# Allegro board OpenCellular_Connect-1_GBC_Life-3_Board_v1.1.brd
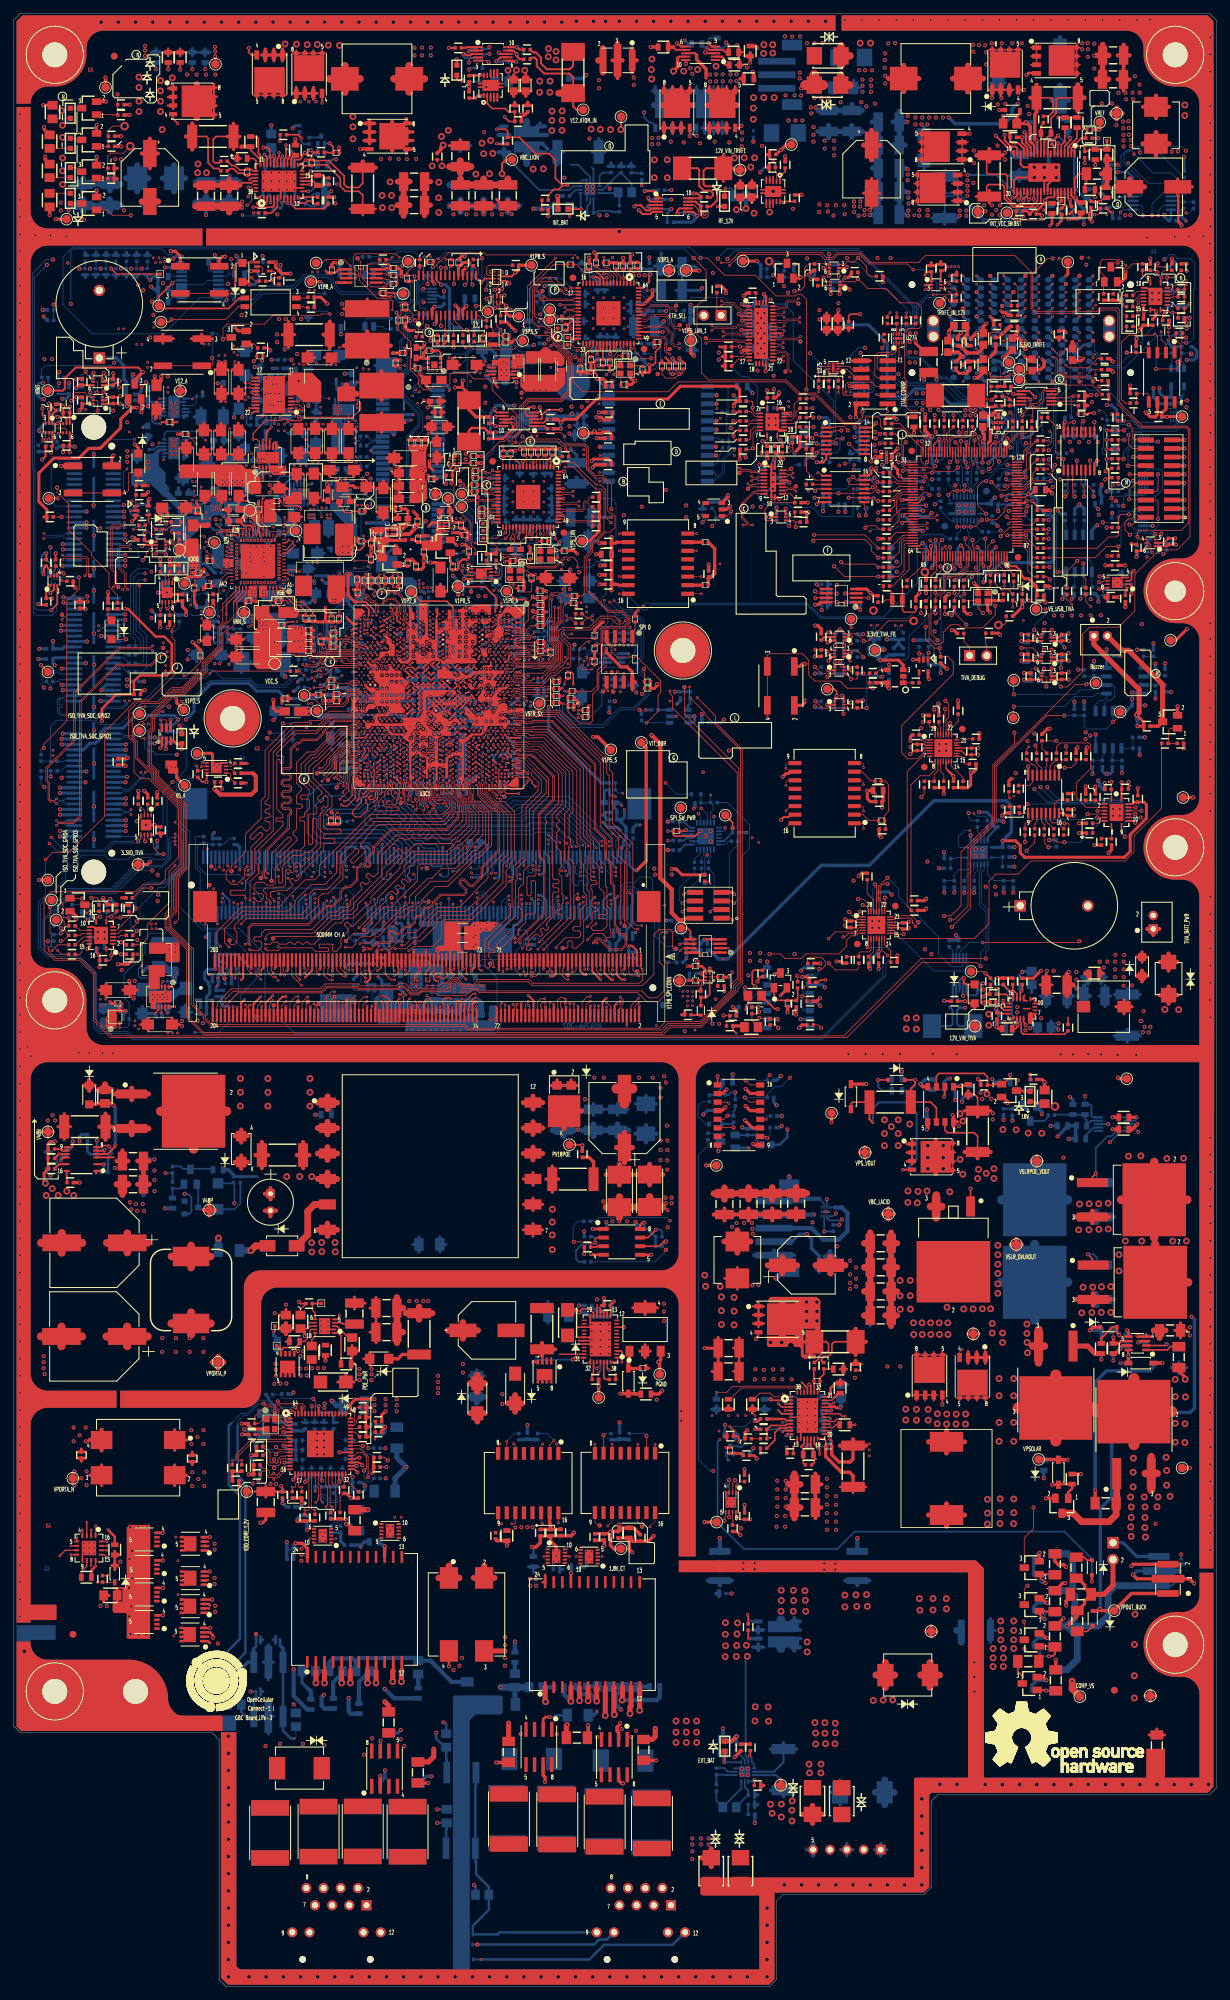
[diagram p0: board, top side]
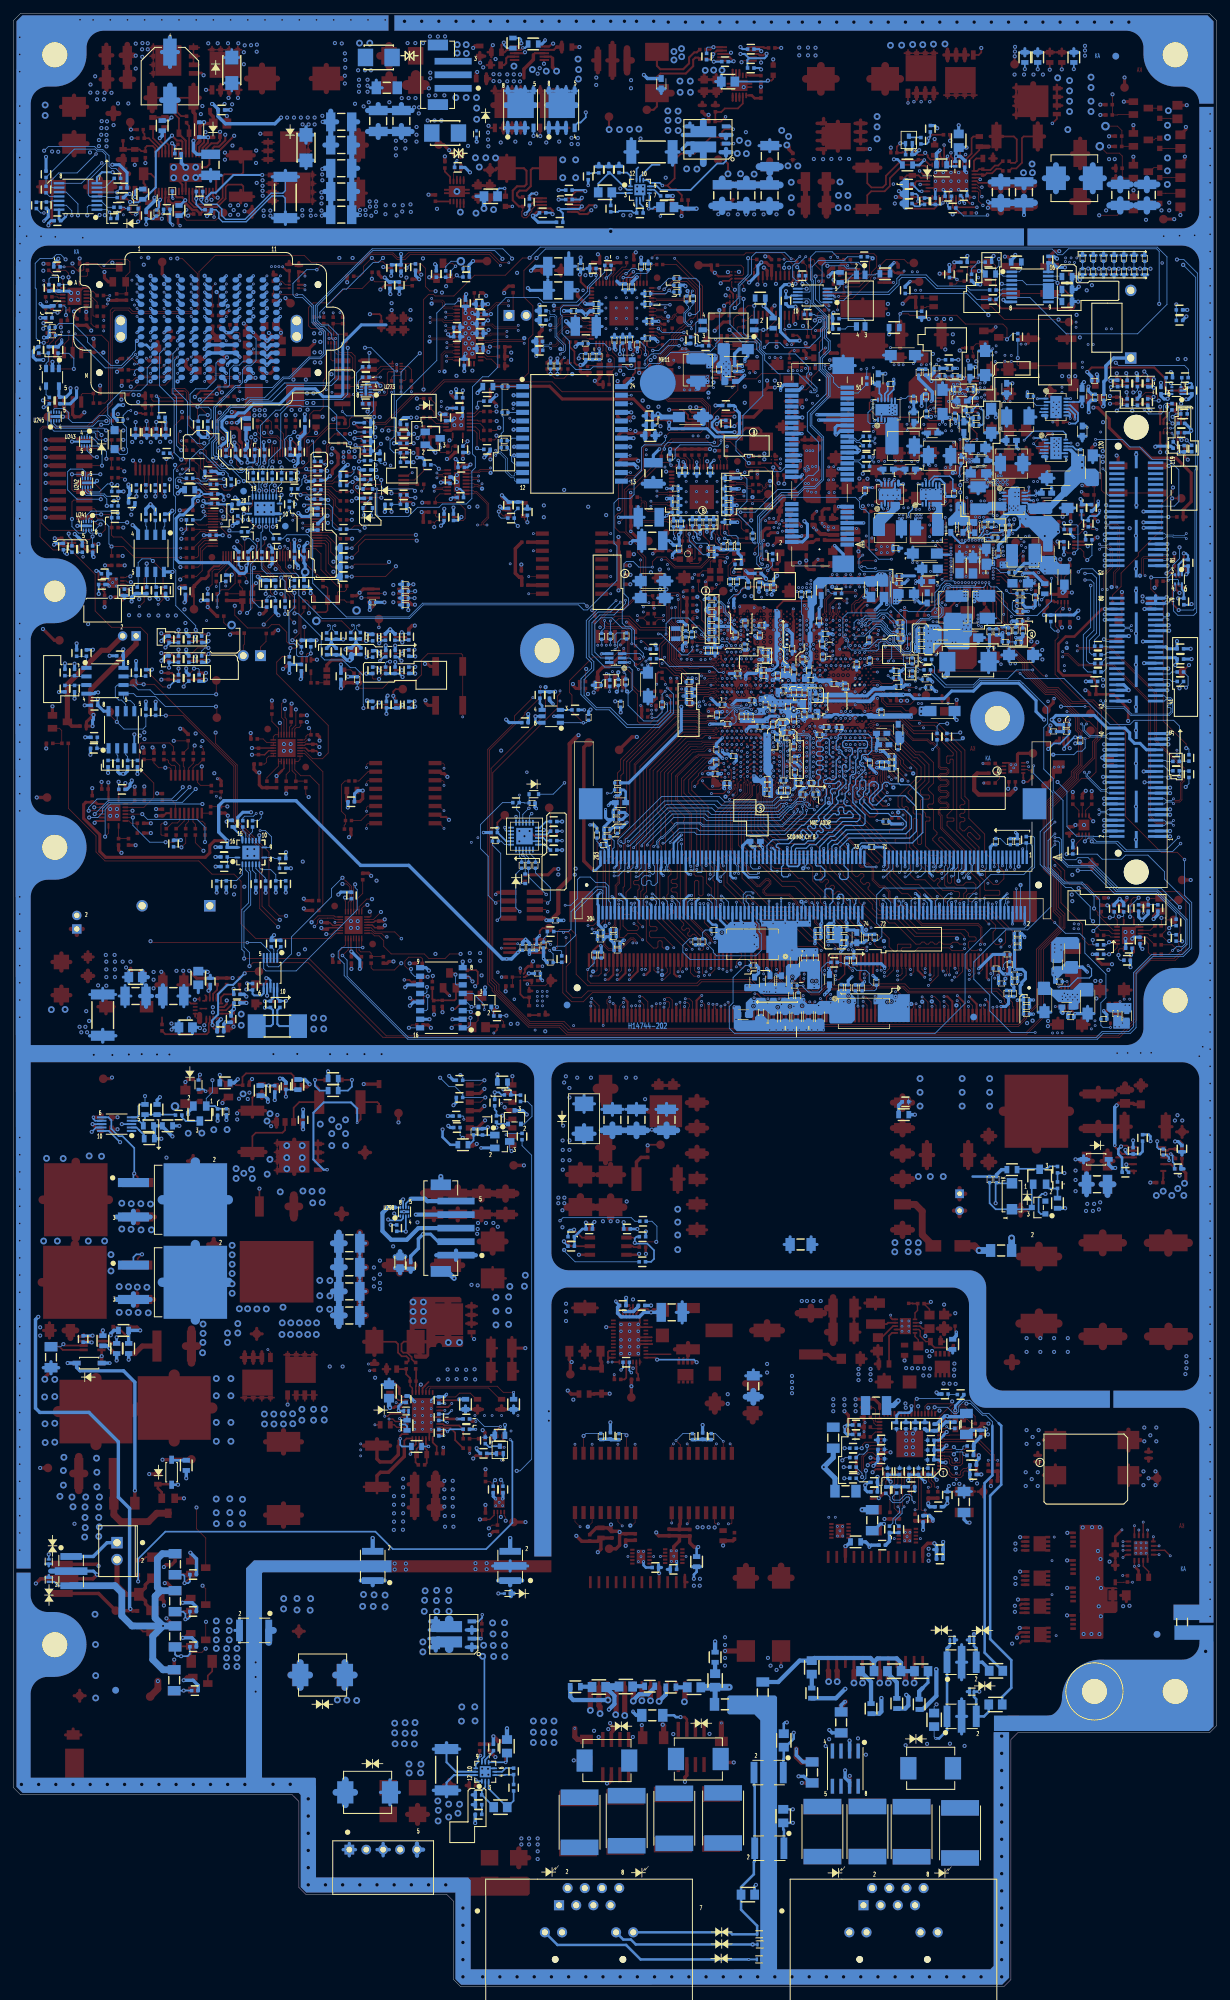
[diagram p1: board, bottom side, seen from below]

Outline 177.8 x 291.49 mm; copper layers: TOP, L2_GND, L3_SIG, L4_PWR1, L5_SIG, L6_SIG, L7_PWR2, L8_SIG, L9_GND, BOTTOM. Coordinates in mm from the lower left corner of the outline.
Outline path: 0,290.48 0,38.51 1.02,37.49 29.36,37.49 30.38,36.48 30.38,1.02 31.4,0 111.74,0 112.76,1.02 112.76,12.6 113.78,13.62 134.6,13.62 135.62,14.63 135.62,27.33 136.64,28.35 176.78,28.35 177.8,29.36 177.8,290.48 176.78,291.49 1.02,291.49 0,290.48

## Design rules (mm)
constraint set DEFAULT: min track width 0.119
net group BAT_D: nets BAT_D N45259
net group DDR3_DRAM_PWROK: nets DDR3_DRAM_PWROK UNNAMED_127_IDTP9145R1P15_I1_DR
net group DDR3_VREF: nets DDR3_VREF UNNAMED_3_RESN_I168_A
net group DP_DDR3_MON1: nets DDR3_MON1N DDR3_MON1P
net group DP_DDR3_MON2: nets DDR3_MON2N DDR3_MON2P
net group DP_DDR3_REF: nets DDR3_REFN DDR3_REFP
net group DP_DEBUG_USB3_RX0: nets DEBUG_USB3_RX0_N DEBUG_USB3_RX0_P
net group DP_DEBUG_USB3_TX0: nets DEBUG_USB3_TX0_N DEBUG_USB3_TX0_P
net group DP_GBE_MDI0P_DEBUG_01: nets GBE_MDI0N_DEBUG GBE_MDI0P_DEBUG
net group DP_GBE_MDI1P_DEBUG_01: nets GBE_MDI1N_DEBUG GBE_MDI1P_DEBUG
net group DP_GBE_MDI2_SW: nets GBE_MDI2N_SW GBE_MDI2P_SW
net group DP_GBE_MDI2P_DEBUG: nets GBE_MDI2N_DEBUG GBE_MDI2P_DEBUG
net group DP_GBE_MDI3P_DEBUG: nets GBE_MDI3N_DEBUG GBE_MDI3P_DEBUG
net group DP_HDMI_CLK_C_D: nets HDMI_CLK_DN HDMI_CLK_DP
net group DP_HDMI_DATA0_D: nets HDMI_DATA0_DN HDMI_DATA0_DP
net group DP_HDMI_DATA1_D: nets HDMI_DATA1_DN HDMI_DATA1_DP
net group DP_HDMI_DATA2_D: nets HDMI_DATA2_DN HDMI_DATA2_DP
net group DP_LAN1_MDI0: nets LAN1_MDI0N LAN1_MDI0P
net group DP_LAN1_MDI1: nets LAN1_MDI1N LAN1_MDI1P
net group DP_LAN1_MDI2: nets LAN1_MDI2N LAN1_MDI2P
net group DP_LAN1_MDI3: nets LAN1_MDI3N LAN1_MDI3P
net group DP_LAN2_MDI0: nets GBE_MDI0N GBE_MDI0P
net group DP_LAN2_MDI1: nets GBE_MDI1N GBE_MDI1P
net group DP_LAN2_MDI2: nets GBE_MDI2N GBE_MDI2P
net group DP_LAN2_MDI3: nets GBE_MDI3N GBE_MDI3P
net group DP_LAN_MDI0: nets LAN_MDI0N LAN_MDI0P
net group DP_LAN_MDI1: nets LAN_MDI1N LAN_MDI1P
net group DP_LAN_MDI2: nets LAN_MDI2N LAN_MDI2P
net group DP_LAN_MDI3: nets LAN_MDI3N LAN_MDI3P
net group DP_M_A_CK_DDR0: nets M_A_CK_DDR0_N M_A_CK_DDR0_P
net group DP_M_A_CK_DDR2: nets M_A_CK_DDR2_N M_A_CK_DDR2_P
net group DP_MDI0: nets MDI0N MDI0P
net group DP_MDI1: nets MDI1N MDI1P
net group DP_PCIE0_GBE_CLK: nets PCIE0_GBE_CLKN PCIE0_GBE_CLKP
net group DP_PCIE0_RX: nets PCIE0_RXN PCIE0_RXP
net group DP_PCIE0_TX: nets PCIE0_TXN PCIE0_TXP
net group DP_PCIE_GBE2_100M_D: nets PCIE_GBE2_100M_DN PCIE_GBE2_100M_DP
net group DP_PCIE_GBE_100M_D: nets PCIE_GBE_100M_DN PCIE_GBE_100M_DP
net group DP_SATA_RX0: nets SATA_RXN0 SATA_RXP0
net group DP_SATA_RX1: nets SATA_RXN1 SATA_RXP1
net group DP_SATA_TX0: nets SATA_TXN0 SATA_TXP0
net group DP_TRXFE_USB3_RX0: nets TRXFE_USB3_RX0_N TRXFE_USB3_RX0_P
net group DP_TRXFE_USB3_TX0: nets TRXFE_USB3_TX0_N TRXFE_USB3_TX0_P
net group DP_USB0: nets USB_DN0 USB_DP0
net group DP_USB1: nets USB_DN1 USB_DP1
net group DP_USB2: nets USB_DN2 USB_DP2
net group DP_USB3: nets USB_DN3 USB_DP3
net group DP_USB3_P0_ICLK: nets USB3_P0_ICLK_DN USB3_P0_ICLK_DP
net group DP_USB3_P1_ICLK: nets USB3_P1_ICLK_DN USB3_P1_ICLK_DP
net group DP_USB3_RX0: nets USB3_RX0_N USB3_RX0_P
net group DP_USB3_TX0: nets USB3_TX0_N USB3_TX0_P
net group DP_USB3_TX0_01: nets N20572057 N20572071
net group DP_USB_REFCLK: nets USB_REFCLKN USB_REFCLKP
net group ETHSW_P1CONN_RX: nets ETHSW_P1CONN_RXN ETHSW_P1CONN_RXP
net group ETHSW_TIVA_P0_TX: nets ETHSW_TIVA_P0_TXN ETHSW_TIVA_P0_TXP
net group GBE_MDI0_SW: nets GBE_MDI0N_SW GBE_MDI0P_SW
net group GBE_MDI1_SW: nets GBE_MDI1N_SW GBE_MDI1P_SW
net group GBE_MDI3_SW: nets GBE_MDI3N_SW GBE_MDI3P_SW
net group LAN1_PET_DN: nets LAN1_PET_DN PCIE2_RXN_LAN
net group LAN1_PET_DP: nets LAN1_PET_DP PCIE2_RXP_LAN
net group LAN1_XTALIN: nets LAN1_XTALIN LAN1_XTALOUT
net group LAN_PCIE_CLKREQ1B: nets LAN_PCIE_CLKREQ1B N21429834
net group LAN_PET_DN: nets LAN_PET_DN PCIE1_RXN_LAN
net group LAN_PET_DP: nets LAN_PET_DP PCIE1_RXP_LAN
net group LAN_XTALIN: nets LAN_XTALIN LAN_XTALOUT
net group MSATA_PWR_EN: nets MSATA_PWR_EN N25801615
net group N264407: nets N264407 N264411
net group N265551: nets N265551 N266029
net group N272981: nets N272981 N272985
net group N274115: nets N274115 N274567
net group N17632894: nets N17632894 N26216543
net group N26216535: nets N39211 N26216535
net group PCIE1_TXN_LAN: nets PCIE1_TXN_LAN UNNAMED_6_BYTISOCR1P1_I118_PC_2
net group PCIE1_TXP_LAN: nets PCIE1_TXP_LAN UNNAMED_6_BYTISOCR1P1_I118_PC_4
net group PCIE2_TXN_LAN: nets PCIE2_TXN_LAN UNNAMED_6_BYTISOCR1P1_I118_PC_1
net group PCIE2_TXP_LAN: nets PCIE2_TXP_LAN UNNAMED_6_BYTISOCR1P1_I118_PC_3
net group PRGMR_SPI_CLK: nets P_SPI_CLK PRGMR_SPI_CLK
net group PRGMR_SPI_CS0_N: nets P_SPI_CS0_N PRGMR_SPI_CS0_N
net group PRGMR_SPI_MISO: nets P_SPI_MISO PRGMR_SPI_MISO
net group PRGMR_SPI_MOSI: nets P_SPI_MOSI PRGMR_SPI_MOSI
net group SOC_FLASH_WP_N: nets SOC_FLASH_WP_N V1P8_SPI_CONN
net group SOC_I2C_SCL: nets SOC_I2C_SCL UNNAMED_7_BYTISOCR1P1_I121_SIOI
net group SOC_I2C_SDA: nets SOC_I2C_SDA UNNAMED_7_BYTISOCR1P1_I121_SI_1
net group SOC_SPI_CLK: nets SOC_SPI_CLK SPI0_CLK
net group SOC_SPI_CS0_N: nets SOC_SPI_CS0_N SPI0_CS0_N
net group SOC_SPI_MISO: nets SOC_SPI_MISO SPI0_MISO
net group SOC_SPI_MOSI: nets SOC_SPI_MOSI SPI0_MOSI
net group SOC_SVID_ALERT_B: nets SOC_SVID_ALERT_B UNNAMED_25_BYTISOCR1P1_I90_SVID
net group SOC_SVID_CLK: nets SOC_SVID_CLK UNNAMED_25_BYTISOCR1P1_I90_SV_1
net group SOC_SVID_DATA: nets SOC_SVID_DATA UNNAMED_25_BYTISOCR1P1_I90_SV_2
net group SUS_STAT_B: nets SUS_STAT_B SUS_STAT_B_R
net group T_ETHSW_TIVA_P0_TX: nets T_ETHSW_TIVA_P0_TXN T_ETHSW_TIVA_P0_TXP
net group T_MDI0: nets T_MDI0N T_MDI0P
net group T_MDI1: nets T_MDI1N T_MDI1P
net group T_RX: nets T_RXN T_RXP
net group T_TIVA_ETHSW_P0_RX: nets T_TIVA_ETHSW_P0_RXN T_TIVA_ETHSW_P0_RXP
net group T_TX: nets T_TXN T_TXP
net group TIVA_ETHSW_P0_RX: nets TIVA_ETHSW_P0_RXN TIVA_ETHSW_P0_RXP
net group TPM_ILB_SERIRQ: nets TPM_ILB_SERIRQ UNNAMED_81_RESN_I34_B
net group UNNAMED_5_BYTISOCR1P1_I176_DDIR: nets UNNAMED_5_BYTISOCR1P1_I176_DD_1 UNNAMED_5_BYTISOCR1P1_I176_DDIR
net group UNNAMED_5_BYTISOCR1P1_I176_RESE: nets UNNAMED_5_BYTISOCR1P1_I176_RE_1 UNNAMED_5_BYTISOCR1P1_I176_RESE
net group UNNAMED_6_BYTISOCR1P1_I118_PCIE: nets UNNAMED_6_BYTISOCR1P1_I118_PC_5 UNNAMED_6_BYTISOCR1P1_I118_PCIE
net group UNNAMED_6_BYTISOCR1P1_I118_SATA: nets UNNAMED_6_BYTISOCR1P1_I118_SA_1 UNNAMED_6_BYTISOCR1P1_I118_SATA
net group UNNAMED_25_BYTISOCR1P1_I90_ICLK: nets UNNAMED_25_BYTISOCR1P1_I90_IC_1 UNNAMED_25_BYTISOCR1P1_I90_ICLK
net group UNNAMED_25_BYTISOCR1P1_I90_IL_1: nets UNNAMED_25_BYTISOCR1P1_I90_IL_1 UNNAMED_25_BYTISOCR1P1_I90_IL_2
net group UNNAMED_119_CAPN_I37_A: nets UNNAMED_119_CAPN_I37_A UNNAMED_119_RESN_I34_B
net group V1P0S_EN: nets UNNAMED_263_NPN_I115_B V1P0S_EN
net group V1P0SX_EN: nets UNNAMED_263_NPN_I95_B V1P0SX_EN
net group M_A_A: nets M_A_A0 M_A_A1 M_A_A2 M_A_A3 M_A_A4 M_A_A5 M_A_A6 M_A_A7 M_A_A8 M_A_A9 M_A_A10 M_A_A11 M_A_A12 M_A_A13 M_A_A14 M_A_A15
net group M_A_DQ: nets M_A_DQ0 M_A_DQ1 M_A_DQ2 M_A_DQ3 M_A_DQ4 M_A_DQ5 M_A_DQ6 M_A_DQ7 M_A_DQ8 M_A_DQ9 M_A_DQ10 M_A_DQ11 M_A_DQ12 M_A_DQ13 M_A_DQ14 M_A_DQ15 M_A_DQ16 M_A_DQ17 M_A_DQ18 M_A_DQ19 M_A_DQ20 M_A_DQ21 M_A_DQ22 M_A_DQ23 M_A_DQ24 M_A_DQ25 M_A_DQ26 M_A_DQ27 M_A_DQ28 M_A_DQ29 M_A_DQ30 M_A_DQ31 M_A_DQ32 M_A_DQ33 M_A_DQ34 M_A_DQ35 M_A_DQ36 M_A_DQ37 M_A_DQ38 M_A_DQ39 M_A_DQ40 M_A_DQ41 M_A_DQ42 M_A_DQ43 M_A_DQ44 M_A_DQ45 M_A_DQ46 M_A_DQ47 M_A_DQ48 M_A_DQ49 M_A_DQ50 M_A_DQ51 M_A_DQ52 M_A_DQ53 M_A_DQ54 M_A_DQ55 M_A_DQ56 M_A_DQ57 M_A_DQ58 M_A_DQ59 M_A_DQ60 M_A_DQ61 M_A_DQ62 M_A_DQ63
net group N265143: nets N265143
net group N273691: nets N273691
net group N309419: nets N309419 N309423 N309461
net group N309685: nets N309685 N309693 N309699
net group N18381947: nets N18381947 N18381949 N18381996
net group N18411831: nets N18411831 N18411833 N18411852 UNNAMED_31_RESN_I19_A UNNAMED_31_RESN_I22_A
net group N18858370: nets N18858370 N18858374 N18858377
net group PLTRST_LAN1_N: nets PLTRST_3P3_N PLTRST_LAN1_N PLTRST_LAN_N
net group UNNAMED_119_CAPN_I20_A: nets UNNAMED_119_CAPN_I20_A UNNAMED_119_CAPN_I22_A UNNAMED_119_CAPN_I22_B UNNAMED_119_CHOKE_I17_INA
net group VSLR_OVUVOUT: nets N235195
net group WAKE_LAN2_N: nets LAN1_WAKE LAN_WAKE UNNAMED_25_BYTISOCR1P1_I90_GP_1 WAKE_LAN2_N WAKE_LAN_N
nets with their own width: min track width 0.114; nets V1P2_S

## Placement (name value [footprint] x y rotation side)
BT1  CR-1220/HFN  [BAT_CR-1220HFN]  12.67 240.59 270 top
BT2  CR-1220/HFN  [BAT_CR-1220HFN]  148.79 159.67 180 top
C1A2  1UF  [SMC0402A]  23.51 231.12 270 top
C1A3  10UF  [SMC1206]  21.13 233.02 180 top
C1A4  22UF  [SMC1206]  30.73 235.31 180 top
C1A5  22UF  [SMC1206]  30.68 229.9 0 top
C1B1  47UF  [SMC1206]  30.78 223.8 0 top
C1B2  10UF  [SMC0603]  24.36 220.63 270 bottom
C1B3  1UF  [SMC0402A]  27.23 217.64 180 top
C1B4  100UF  [SMC1206]  26.54 212.32 180 top
C1B7  1UF  [SMC0402A]  27.73 208.89 270 top
C1D2  10UF  [SMC0402A]  15.85 145.24 270 top
C1L11  1UF  [SMC0402A]  97.92 238.98 180 top
C1N3  0.1UF  [SMC0402A]  88.06 189.89 180 bottom
C1N13  10UF  [SMC0603]  88.85 174.91 90 bottom
C1N14  0.1UF  [SMC0402A]  89.15 173.46 90 bottom
C1N17  0.1UF  [SMC0402A]  89.15 172.42 90 bottom
C1N18  0.1UF  [SMC0402A]  90.53 170.89 90 bottom
C1N19  0.1UF  [SMC0402A]  98.17 157.51 90 bottom
C1N20  0.1UF  [SMC0402A]  98.4 170.72 270 top
C1N21  0.1UF  [SMC0402A]  100.81 149.66 90 bottom
C1N22  0.1UF  [SMC0402A]  101.22 150.74 270 top
C1N23  0.1UF  [SMC0402A]  101.22 148.63 270 top
C1P3  0.1UF  [SMC0402A]  101.55 153.09 0 bottom
C1P4  0.1UF  [SMC0402A]  102.57 153.98 180 bottom
C1P5  10UF  [SMC0402A]  89.59 156.11 90 bottom
C1P6  1UF  [SMC0402A]  90.6 155.7 270 bottom
C1P7  10UF  [SMC0402A]  89.59 155.09 90 bottom
C1P9  1UF  [SMC0402A]  90.6 154.69 270 bottom
C1P10  1UF  [SMC0402A]  89.03 154.08 90 bottom
C1P11  1UF  [SMC0402A]  89.03 153.06 90 bottom
C1P12  0.1UF  [SMC0402A]  91.97 151.94 0 bottom
C1P13  0.1UF  [SMC0402A]  90.93 151.94 0 bottom
C1P14  0.1UF  [SMC0402A]  124.27 204.5 270 bottom
C1P15  0.1UF  [SMC0402A]  120.33 204.12 90 bottom
C2A1  0.1UF  [SMC0402A]  55.7 253.88 90 top
C2A3  0.1UF  [SMC0402A]  47.04 254.05 0 top
C2A9  330UF  [SMC7260_80TALL]  52.27 242.42 180 top
C2A10  10UF  [SMC0603]  59.51 240.62 180 top
C2A11  0.1UF  [SMC0402A]  60.2 239.07 270 top
C2A12  0.1UF  [SMC0402A]  57.06 241.33 90 top
C2A13  330UF  [SMC7260_80TALL]  54.41 236.53 0 top
C2A14  22UF  [SMC1206]  33.25 235.31 180 top
C2A15  22UF  [SMC1206]  33.2 229.9 0 top
C2A16  0.1UF  [SMC0402A]  58.8 227.61 180 top
C2A17  0.1UF  [SMC0402A]  59.84 227.61 180 top
C2B1  100UF  [SMC1206]  56.26 225.81 90 top
C2B2  47UF  [SMC1206]  42.09 226.57 180 top
C2B3  47UF  [SMC1206]  44.58 226.57 180 top
C2B4  47UF  [SMC1206]  47.04 226.54 180 top
C2B5  47UF  [SMC1206]  49.53 226.54 180 top
C2B6  47UF  [SMC1206]  33.27 223.8 0 top
C2B7  10UF  [SMC0805]  59.26 223.6 270 top
C2B8  10UF  [SMC1206]  46.74 224.06 90 top
C2B9  10UF  [SMC1206]  41.86 219.94 180 top
C2B10  10UF  [SMC0805]  59.26 221.69 270 top
C2B11  1UF  [SMC0402A]  38.76 220.14 0 bottom
C2B12  1UF  [SMC0402A]  51.97 221.45 180 bottom
C2B13  47UF  [SMC1206]  35.71 221.31 90 top
C2B14  10UF  [SMC0603]  46.02 224.18 90 bottom
C2B15  10UF  [SMC0603]  47.75 224.18 270 bottom
C2B16  10UF  [SMC0805]  59.26 219.79 270 top
C2B17  2.2UF  [SMC0603]  33.27 218.19 270 top
C2B18  0.1UF  [SMC0402A]  57.3 218.32 270 top
C2B19  47UF  [SMC1206]  41.5 217.12 270 top
C2B20  47UF  [SMC1206]  54.66 217.81 180 top
C2B21  22UF  [SMC0603]  58.29 216.89 270 top
C2B22  10UF  [SMC0603]  33.32 216.54 270 top
C2B23  10UF  [SMC0402A]  59.72 216 180 top
C2B24  0.01UF  [SMC0402A]  53.92 213.92 180 top
C2B25  0.01UF  [SMC0402A]  59.82 213.44 180 top
C2B29  0.1UF  [SMC0402A]  53.92 207.27 180 top
C2B30  0.1UF  [SMC0402A]  54.94 207.27 180 top
C2B31  0.1UF  [SMC0402A]  55.96 207.27 180 top
C2B32  0.1UF  [SMC0402A]  56.97 207.27 180 top
C2B34  100UF  [SMC1206]  36.58 203 90 top
C2B35  1UF  [SMC0402A]  44.02 200.36 270 top
C2B36  22UF  [SMC0805]  38.89 199.67 90 top
C2B37  1UF  [SMC0402A]  44.02 199.34 270 top
C2B39  10UF  [SMC1206]  19.88 142.13 90 top
C2B40  47UF  [SMC1206]  27.1 196.73 270 bottom
C2B41  100UF  [SMC1206]  25.55 227.33 0 top
C2B42  100UF  [SMC1206]  36.47 199.01 270 top
C2B43  100UF  [SMC1206]  36.47 196.47 270 top
C2B45  100UF  [SMC1206]  28.24 220.25 180 top
C2B46  100UF  [SMC1206]  33.3 233.1 180 bottom
C2B47  100UF  [SMC1206]  81.53 207.65 270 bottom
C2B48  100UF  [SMC1206]  81.53 205.13 270 bottom
C2B49  47UF  [SMC1206]  44.37 223.5 0 top
C2B50  100UF  [SMC1206]  84.02 194.11 180 bottom
C2B51  10UF  [SMC1206]  48.59 221.57 90 top
C2B52  10UF  [SMC1206]  25.43 143.94 0 bottom
C2C1  1UF  [SMC0402A]  44.02 198.33 270 top
C2C2  22UF  [SMC0805]  38.87 197.73 90 top
C2C3  1UF  [SMC0402A]  44.02 197.31 270 top
C2C7  1UF  [SMC0402A]  40.56 190.3 270 top
C2C8  330UF  [CAPMP7343X190N]  36.73 195.73 180 bottom
C2C12  1UF  [SMC0402A]  45.54 190.86 270 top
C2L1  0.1UF  [CC0402_AEE]  4.19 210.34 270 bottom
C2L2  0.1UF  [CC0402_AEE]  4.83 210.34 270 top
C2L9  0.1UF  [CC0402_AEE]  4.83 204.62 270 top
C2L10  0.1UF  [CC0402_AEE]  4.83 204.62 270 bottom
C2L14  10UF  [SMC1206]  69.27 241.91 270 bottom
C2L15  1UF  [SMC0402A]  71.22 239.5 180 bottom
C2L16  10UF  [SMC0603]  72.64 237.14 90 bottom
C2M1  10PF  [SMC0402A]  76.35 211.77 0 top
C2M2  10PF  [SMC0402A]  81.85 212.14 270 top
C2M3  0.039UF  [SMC0603]  73.41 212.32 90 top
C2M4  0.1uF  [SMC0402A]  67.65 220.86 90 top
C2M5  1UF  [SMC0402A]  71.64 219.89 270 bottom
C2M6  0.1uF  [SMC0402A]  67.65 221.9 90 top
C2M7  0.01UF  [SMC0402A]  80.45 217.81 90 bottom
C2M9  0.1UF  [SMC0402A]  76.43 215.84 0 bottom
C2M11  0.1UF  [CC0402_AEE]  87.88 207.16 0 top
C2M12  100UF  [SMC1206]  63.09 206.1 180 top
C2M13  1UF  [SMC0402A]  74.14 203.05 270 bottom
C2M14  1UF  [SMC0402A]  74.14 202.03 270 bottom
C2M15  0.1UF  [CC0402_AEE]  87.88 213.26 0 top
C2M16  18PF  [SMC0402A]  78.44 201.2 180 bottom
C2M17  1UF  [SMC0402A]  74.14 201.02 270 bottom
C2M18  1UF  [SMC0402A]  71.07 200.13 180 bottom
C2M19  0.01UF  [SMC0402A]  74.14 200 270 bottom
C2M20  0.1UF  [SMC0402A]  75.03 198.99 90 bottom
C2M21  0.1uF  [SMC0402A]  78.31 248.88 0 bottom
C2M22  0.1uF  [SMC0402A]  77.37 248.91 0 bottom
C2M23  0.039UF  [SMC0603]  86.36 240.34 270 bottom
C2M24  1UF  [SMC0402A]  83.38 246.03 270 bottom
C2M25  0.1UF  [SMC0402A]  93.98 253.71 0 bottom
C2M26  10PF  [SMC0402A]  92.96 238.47 180 top
C2M27  10PF  [SMC0402A]  90.67 236.68 270 top
C2M28  0.01UF  [SMC0402A]  87.38 251.55 180 bottom
C2M33  0.1UF  [CC0402_AEE]  87.88 224.82 180 top
C2M34  0.1UF  [CC0402_AEE]  87.88 228.75 180 top
C2M35  0.1UF  [CC0402_AEE]  88.01 232.56 180 top
C2M36  0.1UF  [CC0402_AEE]  88.01 236.37 180 top
C2M37  0.1UF  [CC0402_AEE]  92.63 66.28 90 top
C2M38  0.1UF  [CC0402_AEE]  85.9 66.41 90 top
C2M41  0.1UF  [CC0402_AEE]  79.38 67.03 90 top
C2M42  0.1UF  [CC0402_AEE]  80.9 67.08 90 top
C2M45  0.1UF  [CC0402_AEE]  130.1 197.23 90 bottom
C2M46  0.1UF  [CC0402_AEE]  126.47 197.28 90 bottom
C2N1  18PF  [SMC0402A]  78.44 198.5 0 bottom
C2N2  1UF  [SMC0402A]  62.71 197.23 0 bottom
C2N3  1UF  [SMC0402A]  66.22 197.06 270 bottom
C2N4  1UF  [SMC0402A]  74.12 196.95 0 bottom
C2N5  0.1UF  [SMC0402A]  75.13 196.95 0 bottom
C2N6  1UF  [SMC0402A]  66.22 196.04 270 bottom
C2N7  1UF  [SMC0402A]  61.19 195.63 0 bottom
C2N8  1UF  [SMC0402A]  63.42 195.02 180 bottom
C2N9  1UF  [SMC0402A]  67.36 194.49 90 bottom
C2N10  1UF  [SMC0402A]  64.82 194.11 180 bottom
C2N11  1UF  [SMC0402A]  62.41 193.75 0 bottom
C2N12  1UF  [SMC0402A]  66.47 193.6 270 bottom
C2N13  1UF  [SMC0402A]  77.5 191.7 270 bottom
C2N14  0.1UF  [SMC0402A]  62.48 191.65 180 bottom
C2N15  0.1UF  [SMC0402A]  63.55 191.49 270 bottom
C2N16  1UF  [SMC0402A]  78.36 190.65 90 bottom
C2N17  4.7UF  [SMC0402A]  66.65 189.84 180 bottom
C2N18  2.2UF  [SMC0402A]  63.32 189.59 180 bottom
C2N19  4.7UF  [SMC0402A]  65.61 189.33 180 bottom
C2N22  1UF  [SMC0402A]  70.18 187.17 0 bottom
C2N23  1UF  [SMC0402A]  68.86 187.17 0 bottom
C2N24  0.47UF  [SMC0402A]  62.46 186.82 0 bottom
C2N25  1UF  [SMC0402A]  67.03 186.13 270 bottom
C2N26  1UF  [SMC0402A]  64.54 186.69 90 bottom
C2N27  2.2UF  [SMC0402A]  63.02 185.24 270 bottom
C2N28  2.2UF  [SMC0402A]  64.95 184.99 180 bottom
C2N31  0.1UF  [SMC0402A]  62.46 182.76 0 bottom
C2N32  0.1UF  [SMC0402A]  73.91 182.35 0 bottom
C2N33  0.1UF  [SMC0402A]  70.97 181.79 270 bottom
C2N34  0.1UF  [SMC0402A]  62.36 181.74 180 bottom
C2N36  2.2UF  [SMC0402A]  73.91 180.44 0 bottom
C2N37  0.1UF  [SMC0402A]  73.66 179.17 270 bottom
C2N38  1UF  [SMC0402A]  65.96 178.36 270 bottom
C2N39  1UF  [SMC0402A]  71.91 177.8 270 bottom
C2N40  1UF  [SMC0402A]  65.96 177.47 270 bottom
C2N41  1UF  [SMC0402A]  65.99 176.23 270 bottom
C2N42  10UF  [SMC0603]  67.41 169.19 270 bottom
C2N43  1UF  [SMC0402A]  65.56 186.03 0 bottom
C2N44  10UF  [SMC0603]  42.72 229.52 90 bottom
C2N45  10UF  [SMC0603]  44.73 231.12 0 bottom
C2N46  10UF  [SMC0603]  31.01 235.33 0 bottom
C2N47  10UF  [SMC0603]  31.09 228.42 90 bottom
C2P1  0.1UF  [SMC0402A]  74.73 156.09 90 bottom
C2P2  0.1UF  [SMC0402A]  75.95 154.79 180 bottom
C2P3  330UF  [SMC7343_75TALL]  68.58 153.98 270 bottom
C2P4  10UF  [SMC0603]  62.31 152.1 180 bottom
C2P6  10UF  [SMC0603]  65.99 149.33 180 bottom
C2P7  10UF  [SMC0603]  64.29 149.33 180 bottom
C2P8  10UF  [SMC0603]  68.28 149.13 180 bottom
C2P10  0.1UF  [SMC0402A]  62.87 145.93 0 bottom
C2P11  0.1UF  [SMC0402A]  67.31 144.35 180 bottom
C2P12  10UF  [SMC0603]  63.75 144.02 180 bottom
C2P13  10UF  [SMC0603]  62.05 144.02 180 bottom
C2P14  10UF  [SMC0603]  65.58 143.99 180 bottom
C2P15  10UF  [SMC0603]  69.19 143.59 270 bottom
C3A10  10UF  [SMC0603]  81.05 238.64 180 top
C3A12  22UF  [SMC0805]  63.25 237.37 270 top
C3A13  47UF  [SMC1206]  76.53 237.11 180 top
C3A14  100UF  [SMC1206]  78.99 237.11 180 top
C3A15  10uF  [SMC0603]  63.06 234.22 270 top
C3A22  0.1UF  [SMC0402A]  60.86 227.61 180 top
C3A23  18PF  [SMC0402A]  72.31 242.88 90 top
C3A24  0.1UF  [SMC0402A]  62.61 243.94 0 top
C3A25  18PF  [SMC0402A]  72.31 243.89 90 top
C3A26  0.1UF  [SMC0402A]  65.76 254.24 180 top
C3A27  47UF  [SMC1206]  75.9 231.88 270 bottom
C3A28  47UF  [SMC1206]  78.65 208.09 90 top
C3B5  0.1UF  [SMC0402A]  77.47 215.84 0 bottom
C3B6  0.1UF  [SMC0402A]  75.39 215.84 0 bottom
C3B7  0.1UF  [SMC0402A]  80.43 221.31 90 bottom
C3B8  0.1UF  [SMC0402A]  80.45 218.82 90 bottom
C3B9  1UF  [SMC0402A]  79.4 212.94 180 bottom
C3B10  0.01UF  [SMC0402A]  71.79 216.33 270 bottom
C3B11  0.01UF  [SMC0402A]  80.43 219.84 90 bottom
C3B12  22UF  [SMC0603]  64.57 217.98 270 top
C3B13  0.1UF  [SMC0402A]  79.17 215.66 0 bottom
C3B14  0.1UF  [SMC0402A]  71.72 221.26 270 bottom
C3B15  0.1UF  [SMC0402A]  66.12 216.31 0 top
C3B16  0.1UF  [SMC0402A]  74.32 215.84 0 bottom
C3B17  10UF  [SMC0402A]  66.24 214.4 90 top
C3B18  0.1UF  [SMC0402A]  71.64 217.83 270 bottom
C3B19  0.1UF  [SMC0402A]  71.64 218.85 270 bottom
C3B20  1UF  [SMC0402A]  74.83 224.45 180 bottom
C3B22  10PF  [SMC0402A]  74.24 210.62 270 top
C3B32  10PF  [SMC0402A]  74.55 206.57 90 top
C3B33  0.1UF  [SMC0402A]  77.37 205.13 90 top
C3B34  0.1UF  [SMC0402A]  83.63 248.57 270 bottom
C3B35  1UF  [SMC0402A]  92.2 241.26 180 bottom
C3B36  1UF  [SMC0402A]  92.14 248.57 90 bottom
C3B37  0.1UF  [SMC0402A]  87.12 240.37 0 top
C3B38  0.1UF  [SMC0402A]  91.19 241.26 180 bottom
C3B39  0.1UF  [SMC0402A]  86.36 251.55 180 bottom
C3B40  0.1UF  [SMC0402A]  87.76 242.81 0 bottom
C3B41  0.1UF  [SMC0402A]  94.68 242.95 90 top
C3B42  0.1UF  [SMC0402A]  83.63 243.49 270 bottom
C3B43  0.1UF  [SMC0402A]  94.55 247.55 270 bottom
C3B44  0.01UF  [SMC0402A]  86.72 242.86 0 bottom
C3B45  0.1UF  [SMC0402A]  88.98 242.79 0 bottom
C3B46  0.01UF  [SMC0402A]  92.14 247.55 90 bottom
C3B47  10UF  [SMC0402A]  67.55 226.09 90 top
C3B48  0.1UF  [SMC0402A]  62.19 222.76 270 top
C3B49  22UF  [SMC0805]  62.56 225.88 180 top
C3C1  0.1UF  [SMC0402A]  77.42 197.33 90 top
C3D1  10UF  [SMC0603]  65.58 156.31 90 top
C3D2  10UF  [SMC0603]  65.58 154.92 90 top
C3D3  10UF  [SMC0603]  65.58 153.52 90 top
C3L4  10UF  [SMC1206]  48.13 241.02 90 bottom
C3L5  10UF  [SMC0603]  49.99 238.28 180 bottom
C3L6  1UF  [SMC0402A]  47.7 236.78 270 bottom
C3L7  12PF  [SMC0402A]  39.85 239.07 90 bottom
C3L8  1UF  [SMC0603]  82.07 280.37 0 bottom
C3L9  0.1UF  [SMC0402A]  44.02 238.05 0 bottom
C3L10  1000PF  [SMC0402A]  39.07 237.95 90 bottom
C3L11  0.1uF  [CC0402_AEE]  62.74 232.56 180 top
C3L12  1UF  [SMC0603]  36.83 234.24 270 bottom
C3L14  10UF  [SMC1206]  40.49 232.34 0 bottom
C3L15  1UF  [SMC0402A]  38.68 231.56 0 bottom
C3L17  10UF  [SMC0603]  37.34 231.14 180 bottom
C3L18  10UF  [SMC1206]  28.13 229.91 0 top
C3L19  10UF  [SMC1206]  47.02 240.67 270 top
C3L20  10UF  [SMC1206]  34.19 238.08 0 bottom
C3L21  10UF  [SMC1206]  25.51 218.48 270 top
C3L22  10UF  [SMC1206]  18.29 222.66 0 bottom
C3L23  10UF  [SMC1206]  68.44 239.59 270 top
C3M1  47UF  [SMC0805]  34.16 227.31 270 bottom
C3M3  10UF  [SMC0603]  33.91 225.43 270 bottom
C3M5  47UF  [SMC0805]  34.04 223.55 270 bottom
C3M6  1UF  [SMC0402A]  33.27 215.57 0 bottom
C3M7  1UF  [SMC0402A]  34.29 215.57 0 bottom
C3M8  2.2UF  [SMC0603]  39.27 214.84 0 bottom
C3M9  2.2UF  [SMC0603]  35.74 214.78 0 bottom
C3M10  1UF  [SMC0402A]  31.7 215.06 0 bottom
C3M11  1UF  [SMC0402A]  47.83 212.5 90 bottom
C3M12  10UF  [SMC0603]  46.48 219.53 180 top
C3M13  10UF  [SMC0603]  48.18 219.38 90 top
C3M14  22UF  [SMC0805]  43.48 209.45 90 bottom
C3M15  22UF  [SMC0805]  37.97 208.79 0 bottom
C3M17  10UF  [SMC0603]  37.47 214.84 0 bottom
C3M18  22UF  [SMC0805]  35.99 211.05 180 bottom
C3M19  100UF  [SMC1206]  41.33 211.71 270 bottom
C3M20  22UF  [SMC0805]  34.01 212.42 180 bottom
C3M21  22UF  [SMC0805]  27.86 207.32 270 bottom
C3M22  10UF  [SMC0805]  51.05 207.57 180 bottom
C3M23  1UF  [SMC0805]  49.15 207.57 180 bottom
C3M24  10UF  [SMC0603]  43.59 207.57 90 bottom
C3M25  22UF  [SMC0603]  58.42 207.04 180 bottom
C3M26  10UF  [SMC0603]  42.75 205.92 180 bottom
C3M27  47UF  [SMC0805]  46.99 205.77 90 bottom
C3M28  1UF  [SMC0402A]  60.2 205.23 0 bottom
C3M29  0.1UF  [SMC0402A]  58.72 201.32 0 bottom
C3M30  1UF  [SMC0402A]  44.02 200.36 90 bottom
C3M31  0.01UF  [SMC0402A]  58.27 199.85 90 bottom
C3M32  10UF  [SMC0603]  41.22 199.62 90 bottom
C3M33  1UF  [SMC0402A]  44.02 199.34 90 bottom
C3M96  0.1u  [RC0603]  108.66 281.87 0 top
C3M97  0.1u  [RC0603]  108.89 285.94 90 top
C3M98  0.1u  [RC0603]  96.02 286.54 180 top
C3M102  0.1u  [RC0603]  155.04 127.15 180 bottom
C3M103  0.1u  [RC0603]  164.08 128.42 180 top
C3M105  0.1uF  [CC0402_AEE]  139.19 132.62 270 bottom
C3M107  4.7NF  [CC0402_AEE]  135 128.04 90 bottom
C3M108  0.01uF  [CC0603]  130.56 134.14 0 bottom
C3M126  0.47uF  [CC0603]  119.63 82.91 270 bottom
C3M127  0.1uF  [CC0402_AEE]  124.46 91.52 270 top
C3M128  0.1uF  [CC0402_AEE]  117.5 77.07 180 top
C3M130  100pF  [CC0402_AEE]  110.87 83.85 180 top
C3M132  0.01uF  [CC0402_AEE]  110.87 82.32 180 top
C3M133  0.22uF  [CC0402_AEE]  110.87 80.93 180 top
C3M148  0.1uF  [CC0402_AEE]  62.62 270.36 90 top
C3M149  0.1uF  [CC0402_AEE]  46.61 266.73 270 top
C3M151  100pF  [CC0402_AEE]  39.65 264.49 0 bottom
C3M153  0.01uF  [CC0402_AEE]  41.55 263.76 90 bottom
C3M154  0.22uF  [CC0402_AEE]  43.15 263.76 270 bottom
C3M155  0.1uF  [CC0402_AEE]  37.21 269.27 270 bottom
C3M158  0.47uF  [CC0603]  40.64 269.14 0 bottom
C3M163  0.01uF  [CC0603]  160.78 94.26 270 bottom
C3M165  470nF  [CC0603]  164.59 95.4 90 bottom
C3M166  1NF  [CC0402_AEE]  167.51 95.66 90 bottom
C3M167  0.1uF  [CC0402_AEE]  119.76 86.77 90 bottom
C3M169  150uF  [CAPAE830X1050N]  126.82 268.51 0 top
C3M170  270uF  [CAPAE1030X1050N_PEC]  90.3 128.3 90 top
C3M171  0.1u  [RC0603]  164.08 126.65 180 top
C3M172  1NF  [CC0402_AEE]  102.74 208.69 90 top
C3M173  1NF  [CC0402_AEE]  89.59 81.36 90 bottom
C3M174  1NF  [CC0402_AEE]  75.95 81.32 90 bottom
C3M175  1NF  [CC0402_AEE]  128.42 170.99 180 top
C3M177  1NF  [CC0402_AEE]  10.03 78.51 270 top
C3M178  1NF  [CC0402_AEE]  26.42 78.01 270 top
C3M179  47UF  [SMC0805]  42.39 188.39 270 top
C3M180  100UF  [SMC1206]  42.27 188.44 90 bottom
C3M181  22UF  [SMC0805]  28.6 201.09 0 top
C3N1  1UF  [SMC0402A]  44.02 198.33 90 bottom
C3N2  1UF  [SMC0402A]  58.27 197.89 0 bottom
C3N3  22UF  [SMC0805]  35.2 199.29 270 bottom
C3N4  1UF  [SMC0402A]  44.02 197.31 90 bottom
C3N6  1UF  [SMC0402A]  60.2 194.9 180 bottom
C3N7  1UF  [SMC0402A]  53.19 194.9 0 bottom
C3N8  1UF  [SMC0402A]  47.75 194.34 90 bottom
C3N9  1UF  [SMC0402A]  59.51 192.99 270 bottom
C3N11  1UF  [SMC0402A]  56.97 192.46 90 bottom
C3N12  1UF  [SMC0402A]  47.42 192.03 90 bottom
C3N13  1UF  [SMC0402A]  54.81 191.65 0 bottom
C3N14  0.1UF  [SMC0402A]  60.88 191.59 180 bottom
C3N16  1UF  [SMC0402A]  59.26 190.96 180 bottom
C3N18  2.2UF  [SMC0402A]  60.91 188.37 180 bottom
C3N20  1UF  [SMC0402A]  49.5 187.81 0 bottom
C3N21  1UF  [SMC0402A]  59.69 187.63 90 bottom
C3N23  1UF  [SMC0402A]  56.21 186.06 90 bottom
C3N24  1UF  [SMC0402A]  57.25 186.08 270 bottom
C3N25  1UF  [SMC0402A]  47.07 182.73 0 bottom
C3N26  2.2UF  [SMC0603]  47.04 186.49 180 bottom
C3N27  2.2UF  [SMC0402A]  59.11 184.94 90 bottom
C3N28  22UF  [SMC0603]  48.41 183.47 270 bottom
C3N29  22UF  [SMC0603]  48.72 185.14 270 bottom
C3N30  0.1UF  [SMC0402A]  51.23 181.21 180 bottom
C3N31  0.1UF  [SMC0402A]  49.45 180.06 0 bottom
C3N32  22UF  [SMC0805]  64.06 230.44 270 top
C3P1  0.1UF  [SMC0402A]  51.41 168.33 90 bottom
C3P3  0.1UF  [SMC0402A]  57.45 156.09 90 bottom
C3P4  0.1UF  [SMC0402A]  54.61 156.09 270 bottom
C3P5  0.1UF  [SMC0402A]  58.47 156.06 270 bottom
C3P6  10UF  [SMC0603]  53.16 155.73 180 bottom
C3P7  0.1UF  [SMC0402A]  51.79 155.42 180 bottom
C3P8  0.1UF  [SMC0402A]  57.43 155.04 90 bottom
C3P9  0.1UF  [SMC0402A]  54.61 155.04 270 bottom
C3P10  0.1UF  [SMC0402A]  58.45 155.02 270 bottom
C3P12  0.1UF  [SMC0402A]  54.64 154.15 270 bottom
C3P13  0.1UF  [SMC0402A]  59.21 152.43 180 bottom
C3P14  0.1UF  [SMC0402A]  60.93 152.4 180 bottom
C3P15  0.1UF  [SMC0402A]  53.59 152 180 bottom
C3P16  10UF  [SMC0603]  57.2 149.51 180 bottom
C3P17  0.1UF  [SMC0402A]  55.47 147.14 0 bottom
C3P18  0.1UF  [SMC0402A]  54.43 147.12 0 bottom
C3P19  0.1UF  [SMC0402A]  53.39 147.09 0 bottom
C3P20  0.1UF  [SMC0402A]  52.37 147.09 0 bottom
C3P21  10UF  [SMC0603]  60.3 144.07 180 bottom
C3P22  10UF  [SMC0603]  58.6 144.05 180 bottom
C3P23  330UF  [SMC7343_75TALL]  52.1 143.77 90 bottom
C4A10  1UF  [SMC0402A]  18.45 237.21 90 bottom
C4A11  1UF  [SMC0402A]  98.93 238.98 180 top
C4B3  1000PF  [CC0603]  107.7 236.37 0 bottom
C4L4  10UF  [SMC0603]  19.86 236.1 180 bottom
C4L5  1UF  [SMC0603]  36.45 239.27 180 bottom
C4L6  10UF  [SMC0603]  19.84 230.56 180 bottom
C4M2  10UF  [SMC1206]  21.51 222.84 270 bottom
C4M3  1UF  [SMC0402A]  20.07 226.19 0 bottom
C4M6  10UF  [SMC0805]  24.94 212.78 180 bottom
C4M7  10UF  [SMC1206]  25.58 218.44 90 bottom
C4M9  1UF  [SMC0402A]  32.23 211.33 0 bottom
C4M10  10UF  [SMC0805]  22.48 207.11 0 bottom
C4P1  0.1UF  [SMC0402A]  30.48 168.71 0 bottom
C4P2  0.1UF  [SMC0402A]  29.44 168.71 0 bottom
C4P3  10UF  [SMC0402A]  29.87 155.55 90 bottom
C4P4  10UF  [SMC0402A]  29.87 154.54 90 bottom
C4P5  47UF  [SMC1206]  21.34 154.15 180 bottom
C4P6  0.1UF  [CC0402_AEE]  152.4 206.15 270 bottom
C4P7  1UF  [SMC0402A]  29.87 153.52 90 bottom
C4P10  10UF  [SMC0603]  23.44 151.72 180 bottom
C4P11  10UF  [SMC0402A]  30.28 149.51 90 bottom
C4P12  0.1UF  [SMC0402A]  30.28 148.47 90 bottom
C4P13  0.1UF  [CC0402_AEE]  151.76 205.51 0 top
C4P14  0.1UF  [SMC0402A]  31.04 147.17 180 bottom
C4P15  0.1UF  [SMC0402A]  29.95 147.14 180 bottom
C4P16  1UF  [SMC0402A]  28.52 145.75 90 bottom
C4P17  1UF  [SMC0402A]  28.52 144.71 90 bottom
C4P18  10UF  [SMC0603]  21.34 144.71 270 bottom
C4P19  10UF  [SMC1206]  19.05 143.74 0 bottom
C4P20  1UF  [SMC0402A]  28.52 143.66 90 bottom
C4P21  0.1UF  [SMC0402A]  14.94 143.28 0 bottom
C4P23  1UF  [SMC0402A]  21.08 143.21 270 bottom
C4P24  22UF  [SMC0603]  13.26 142.65 0 bottom
C4P25  47UF  [SMC1206]  17.23 147.21 270 top
C423  0.1uF  [CC0402_AEE]  132.82 215.65 270 bottom
C424  0.1uF  [CC0402_AEE]  132.82 217.91 270 bottom
C449  0.1uF  [CC0402_AEE]  39.75 72.62 270 top
C450  0.1uF  [CC0402_AEE]  39.78 72.62 270 bottom
C451  0.1uF  [CC0402_AEE]  41.71 82.6 270 bottom
C452  0.1uF  [CC0402_AEE]  42.65 76.1 90 bottom
C453  0.1uF  [CC0402_AEE]  47.29 82.86 270 bottom
C455  10UF  [CC1206]  37.31 71.58 270 bottom
C456  0.1uF  [CC0402_AEE]  45.9 82.86 270 bottom
C457  0.1uF  [CC0402_AEE]  44.5 82.86 270 bottom
C458  0.1uF  [CC0402_AEE]  50.6 74.47 180 bottom
C459  0.1uF  [CC0402_AEE]  50.6 73.08 180 bottom
C460  0.1uF  [CC0402_AEE]  43.1 82.86 270 bottom
C461  10UF  [CC1206]  54.84 73.18 0 bottom
C462  0.1uF  [CC0402_AEE]  48.62 76.1 90 bottom
C463  0.1uF  [CC0402_AEE]  49.56 79.35 180 bottom
C464  0.1uF  [CC0402_AEE]  44.04 76.1 90 bottom
C465  0.1uF  [CC0402_AEE]  45.44 76.1 90 bottom
C466  0.1uF  [CC0402_AEE]  46.84 76.1 90 bottom
C467  10UF  [CC1206]  50.88 68.89 270 bottom
C468  0.1uF  [CC0402_AEE]  49.56 77.95 180 bottom
C469  0.1uF  [CC0402_AEE]  42.21 80.7 0 bottom
C470  0.1uF  [CC0402_AEE]  42.21 79.25 0 bottom
C471  10UF  [CC1206]  36.96 83.11 270 bottom
C472  0.1uF  [CC0402_AEE]  49.56 80.75 180 bottom
C473  10UF  [CC1206]  50.42 68.89 270 top
C474  0.1uF  [CC0402_AEE]  42.24 77.8 0 bottom
C475  12pF  [CC0402_AEE]  35.18 83.16 180 top
C476  12pF  [CC0402_AEE]  38.66 82.91 90 bottom
C485  1uF  [CC0805]  150.5 149 90 bottom
C486  1uF  [CC0805]  152.35 141.71 0 bottom
C487  1uF  [CC0603]  159.74 149.71 180 top
C488  1uF  [CC0603]  146.86 141.51 180 top
C489  0.1uF  [CC0402_AEE]  146.3 148.49 90 top
C490  10pF  [SMC0402A]  145.22 145.32 90 bottom
C491  0.1uF  [CC0402_AEE]  155.85 141.66 90 top
C502  4.7UF  [CC0805]  159.77 149.13 180 bottom
C515  100uF  [CC1210]  159.77 146.33 180 bottom
C519  0.1uF  [CC0402_AEE]  148.08 220.5 180 bottom
C520  12pF  [CC0402_AEE]  140.46 204.24 270 top
C521  12pF  [CC0402_AEE]  146.3 205.26 270 top
C522  0.1uF  [CC0402_AEE]  140.72 226.6 270 bottom
C523  0.1uF  [CC0402_AEE]  132.84 222.53 0 bottom
C524  0.1uF  [CC0402_AEE]  136.27 211.61 90 bottom
C525  0.1uF  [CC0402_AEE]  148.32 214.41 180 bottom
C526  0.1uF  [CC0402_AEE]  144.53 211.48 90 bottom
C527  10nF  [CC0402_AEE]  149.05 223.85 180 bottom
C528  0.1uF  [CC0402_AEE]  135.51 226.72 270 bottom
C529  0.1uF  [CC0402_AEE]  144.98 226.54 270 bottom
C530  0.1uF  [CC0402_AEE]  136.91 226.72 270 bottom
C531  0.1uF  [CC0402_AEE]  148.08 219.1 180 bottom
C532  0.1uF  [CC0402_AEE]  139.57 211.48 90 bottom
C533  10nF  [CC0402_AEE]  132.84 219.74 0 bottom
C534  10nF  [CC0402_AEE]  134.75 230.91 90 bottom
C535  0.1uF  [CC0402_AEE]  134.75 230.91 90 top
C536  1uF  [CC0603]  133.1 231.17 90 top
C1515  0.1uF  [CC0402_AEE]  162.81 209.96 0 top
C1533  0.047uF  [CC0603]  14.96 64.52 90 top
C1534  10000PF  [CC0805]  43.64 46.59 0 bottom
C1535  10000PF  [CC0805]  59.82 47.14 90 bottom
C1536  10000PF  [CC0805]  51.61 46.59 180 bottom
C1537  10000PF  [CC0805]  47.62 46.59 180 bottom
C1538  1000PF  [CC1206]  67.06 43.44 270 bottom
C1540  0.1uF  [CC0402_AEE]  40.89 63.15 180 bottom
C1541  10NF  [CC0402_AEE]  40.89 64.54 180 bottom
C1543  10NF  [CC0402_AEE]  35.97 75.64 180 bottom
C1544  10NF  [CC0402_AEE]  35.97 77.04 180 bottom
C1546  1000PF  [CC0603]  53.34 65.69 180 bottom
C1547  0.1uF  [CC0402_AEE]  80.26 61.62 180 bottom
C1548  10NF  [CC0402_AEE]  82.93 61.9 0 bottom
C1549  1000PF  [CC0603]  76.83 62.77 90 bottom
C1553  10NF  [CC0402_AEE]  41.12 70.87 180 bottom
C1554  10NF  [CC0402_AEE]  43.37 69.08 270 bottom
C1555  10000PF  [CC0805]  77.22 44.2 180 bottom
C1556  10000PF  [CC0805]  74.1 45.21 270 bottom
C1557  10000PF  [CC0805]  91.29 44.24 180 bottom
C1558  10000PF  [CC0805]  87.3 44.31 0 bottom
C1559  10uF  [CAPAE830X1050N]  69.98 96.93 90 top
C1560  0.22uF  [CC1206]  68.45 88.67 270 bottom
C1561  1000PF  [CC1206]  72.64 41.68 180 bottom
C1562  0.1uF  [CC0402_AEE]  87.76 100.61 180 top
C1563  1.0uF  [CC1210]  80.52 99.6 180 bottom
C1564  47nF  [CC0805]  40.26 98.2 90 top
C1565  0.047uF  [CC0603]  46.1 94.01 90 top
C1573  220PF  [CC0603]  46.23 128.81 180 bottom
C1574  6800PF  [CC0402_AEE]  10.92 125.38 90 bottom
C1576  33NF  [CC0402_AEE]  5.11 123.78 90 bottom
C1577  470PF  [CC0402_AEE]  5.59 122.33 180 top
C1579  2.2UF  [CC1210]  17.65 118.52 0 bottom
C1583  0.1uF  [CC0402_AEE]  147.78 273.2 180 top
C1584  0.1uF  [CC0402_AEE]  147.07 277.24 0 bottom
C1585  0.1uF  [CC0402_AEE]  153.49 270.79 180 bottom
C1595  0.033uF  [CC0402_AEE]  148.69 262.33 180 top
C1597  1000pF  [SMC0402A]  156.67 262.47 180 bottom
C1598  10000pF  [CC0402_AEE]  155.14 262.56 180 bottom
C1602  0.1uF  [CC0402_AEE]  150.32 265.2 0 bottom
C1649  4.7UF  [CC0805]  147.27 275.24 180 top
C1650  0.47uF  [CC0603]  152.6 273.81 180 top
C1651  0.1uF  [CC0402_AEE]  142.47 147.7 270 bottom
C1671  2.2uF  [CC0603]  122.86 82.98 0 top
C1672  1000pF  [SMC0402A]  120.93 79.78 270 top
C1673  1000pF  [SMC0402A]  118.3 89.44 90 top
C1674  0.33UF  [CC0603]  118.24 79.78 0 bottom
C1675  0.33UF  [CC0603]  122.17 88.42 90 top
C1677  1uF  [CC0603]  121.92 91.21 0 top
C1678  10uF  [CC1210]  128.17 109.81 180 bottom
C1679  10uF  [CC1210]  128.17 102.69 180 bottom
C1680  10uF  [CC1210]  128.17 102.69 180 top
C1681  10uF  [CC1210]  128.17 99.14 180 bottom
C1682  10uF  [CC1210]  112.14 115.62 90 top
C1683  10uF  [CC1210]  115.67 115.65 90 top
C1684  10uF  [CC1210]  105.08 115.6 90 top
C1685  10uF  [CC1210]  108.64 115.62 90 top
C1686  10uF  [CC1210]  128.17 106.25 180 top
C1687  10uF  [CC1210]  128.17 109.81 180 top
C1688  10uF  [CC1210]  128.17 99.14 180 top
C1689  10uF  [CC1210]  128.17 106.25 180 bottom
C1709  1uF  [CC0603]  33.78 270.08 180 top
C1710  10uF  [CC1210]  69.48 264.62 270 top
C1711  10uF  [CC1210]  66.03 270.42 90 bottom
C1712  10uF  [CC1210]  69.48 264.62 270 bottom
C1713  10uF  [CC1210]  73.06 264.63 270 top
C1714  10uF  [CC1210]  66.05 264.62 270 bottom
C1715  10uF  [CC1210]  66.03 270.42 90 top
C1716  10uF  [CC1210]  73.06 264.63 270 bottom
C1717  10uF  [CC1210]  66.05 264.62 270 top
C1718  10uF  [CC1210]  28.45 265.08 270 bottom
C1719  10uF  [CC1210]  31.88 265.08 270 bottom
C1720  10uF  [CC1210]  31.88 264.57 270 top
C1721  10uF  [CC1210]  28.45 264.57 270 top
C1722  2.2uF  [CC0603]  41.66 271.3 90 top
C1723  1000pF  [SMC0402A]  44.07 269.9 0 top
C1724  1000pF  [SMC0402A]  34.54 267.62 180 top
C1725  0.33UF  [CC0603]  35.05 272.57 270 top
C1726  0.33UF  [CC0603]  45.67 269.12 180 bottom
C1731  0.1uF  [CC0402_AEE]  151.26 50.19 180 bottom
C1732  0.1uF  [CC0402_AEE]  151.26 55.4 180 bottom
C1733  0.1uF  [CC0402_AEE]  151.26 60.86 180 bottom
C1740  0.01uF  [SMC0402A]  114.43 145.7 0 top
C1741  10uF  [CC1210]  116.97 70.77 180 top
C1742  10uF  [CC1210]  116.97 74.2 180 top
C1743  10uF  [CC1210]  59.21 266.66 0 top
C1744  10uF  [CC1210]  59.19 263.18 0 top
C1745  0.01uF  [SMC0402A]  109.8 125.82 0 bottom
C1746  0.1uF  [CC0402_AEE]  155.32 229.64 270 bottom
C1747  0.01uF  [SMC0402A]  105.92 78.77 180 top
C1748  0.01uF  [SMC0402A]  47.24 270.92 90 top
C1753  0.1uF  [CC0402_AEE]  121.39 196.93 90 bottom
C1754  0.1uF  [CC0402_AEE]  122.79 196.93 90 bottom
C1755  0.1uF  [CC0402_AEE]  121.43 199.37 90 bottom
C1756  0.1uF  [CC0402_AEE]  122.83 199.37 90 bottom
C1757  0.1uF  [CC0402_AEE]  122.68 189.38 270 bottom
C1758  0.1uF  [CC0402_AEE]  121.28 189.38 270 bottom
C1761  0.1uF  [CC0402_AEE]  122.81 194.46 270 bottom
C1762  0.1uF  [CC0402_AEE]  121.41 194.46 270 bottom
C1765  10uF  [CC0805]  38.1 272.7 90 bottom
C1767  10uF  [CC0805]  122.3 87.91 90 bottom
C1775  10uF  [CC1210]  162.53 285.32 180 top
C1776  0.1uF  [CC0402_AEE]  158.95 273.08 0 top
C1777  0.1uF  [CC0402_AEE]  87.88 209.96 180 top
C1778  10NF  [CC0402_AEE]  87.88 208.56 180 top
C1779  1000PF  [CC0603]  87.63 211.61 180 top
C1783  0.1uF  [CC0402_AEE]  83.82 232.06 180 bottom
C1784  10NF  [CC0402_AEE]  83.82 230.66 180 bottom
C1785  1000PF  [CC0603]  83.69 229.14 180 bottom
C1795  10uF  [CC1210]  148.67 269.14 270 bottom
C1796  10uF  [CC1210]  129.36 275.49 180 bottom
C1797  10uF  [CC1210]  120.47 275.62 270 bottom
C1798  10uF  [CC1210]  123.9 275.62 270 bottom
C1799  10uF  [CC1210]  129.36 272.06 180 bottom
C1800  10uF  [CC1210]  129.36 265.2 180 bottom
C1801  10uF  [CC1210]  129.36 268.63 180 bottom
C1802  10uF  [CC1210]  129.36 261.77 180 bottom
C1803  0.1uF  [CC0402_AEE]  87.32 66.41 270 top
C1804  10NF  [CC0402_AEE]  89.36 66.75 270 top
C1805  1000PF  [CC0603]  90.98 67.01 270 top
C1806  470PF  [CC0402_AEE]  5.59 123.73 180 top
C1807  10uF  [CC1210]  89.28 128.04 90 bottom
C1808  10uF  [CC1210]  85.72 128.04 90 bottom
C1809  10uF  [CC1210]  81.28 128.04 90 bottom
C1810  2.2UF  [CC1210]  55.12 100.23 180 top
C1811  2.2UF  [CC1210]  55.12 96.67 180 top
C1813  0.1uF  [CC0402_AEE]  13.46 120.3 0 bottom
C1814  220PF  [CC0402_AEE]  84.07 122.96 270 top
C1816  0.1uF  [CC0402_AEE]  99.59 262.05 0 bottom
C1817  0.1uF  [CC0402_AEE]  72.64 284.38 0 bottom
C1819  0.22uF  [CAPPRD250W50D655H1250B]  37.97 117.12 270 top
C1821  2.2UF  [CC1210]  17.65 118.52 0 top
C1822  2200PF  [CC0402_AEE]  101.85 217.83 90 bottom
C1823  0.1uF  [CC0402_AEE]  104.65 218.85 90 bottom
C1826  0.1uF  [CC0402_AEE]  171.32 260.89 0 bottom
C1827  0.1uF  [CC0402_AEE]  125.48 224.06 180 bottom
C1828  0.1uF  [CC0402_AEE]  125.48 231.04 180 bottom
C1829  0.1uF  [CC0402_AEE]  114.94 86.64 90 bottom
C1830  0.1uF  [CC0402_AEE]  37.34 264.59 180 bottom
C1833  10NF  [CC0402_AEE]  51.74 229.03 180 bottom
C1834  10NF  [CC0402_AEE]  51.74 227.64 180 bottom
C1835  10NF  [CC0402_AEE]  51.74 225.99 180 bottom
C1836  10NF  [CC0402_AEE]  51.74 224.59 180 bottom
C1846  0.1uF  [CC0402_AEE]  77.85 67.03 270 top
C1847  10NF  [CC0402_AEE]  71.25 66.58 270 top
C1848  1000PF  [CC0603]  72.92 66.6 270 top
C1849  0.1uF  [CC0402_AEE]  127.89 175.03 0 bottom
C1850  10NF  [CC0402_AEE]  127.91 175.06 0 top
C1851  1000PF  [CC0603]  127.79 176.71 0 top
C1852  NFM18PC  [EMIFIL_NFM18PC104R1C3D]  129.03 225.96 0 top
C1853  0.01uF  [CC0402_AEE]  143.54 226.57 270 bottom
C1854  NFM18PC  [EMIFIL_NFM18PC104R1C3D]  145.54 231.04 270 top
C1856  0.47UF  [EMIFIL_101X43W474MV4E]  169.29 61.37 270 bottom
C1857  0.47UF  [EMIFIL_101X43W474MV4E]  142.24 52.61 0 bottom
C1858  0.47UF  [EMIFIL_101X43W474MV4E]  124.71 62.13 90 bottom
C1859  0.47UF  [EMIFIL_101X43W474MV4E]  104.39 62.13 90 bottom
C1865  0.47UF  [EMIFIL_101X43W474MV4E]  89.28 284.57 180 top
C1868  10uF  [CC1210]  17.65 121.95 0 top
C1869  47nF  [CC0805]  14.33 57.79 180 top
C1870  1000PF  [CC1206]  61.47 109.63 0 bottom
C1874  0.1uF  [CC0402_AEE]  87.76 100.61 180 bottom
C1875  0.1uF  [CC0402_AEE]  87.12 111.91 0 bottom
C1876  0.1uF  [CC0402_AEE]  92.71 111.91 180 bottom
C1877  0.1uF  [CC0402_AEE]  108.05 69.5 90 top
C1878  0.1uF  [CC0402_AEE]  162.18 205.26 0 top
C1879  0.1uF  [CC0402_AEE]  30.2 177.98 0 top
C1880  0.1uF  [CC0402_AEE]  141.36 239.6 270 top
C1881  0.1uF  [CC0402_AEE]  21.74 170.84 90 top
C1882  0.1uF  [CC0402_AEE]  67.77 208.76 0 bottom
C1886  12pF  [CC0402_AEE]  127.76 205.01 90 top
C1887  12pF  [CC0402_AEE]  133.35 204.24 90 top
C1888  0.1uF  [CC0402_AEE]  134.87 211.61 90 bottom
C1889  0.1uF  [CC0402_AEE]  134.87 207.29 270 bottom
C1890  0.1uF  [CC0402_AEE]  143.13 211.48 90 bottom
C1891  1uF  [CC0603]  151.76 221.13 0 bottom
C1892  2.2uF  [CC0603]  151.76 221.13 0 top
C1893  47uF  [CC1210]  135.25 240.01 90 top
C1894  1uF  [CC0603]  143.26 230.91 90 bottom
C1899  0.1uF  [CC0402_AEE]  5.33 197.64 180 bottom
C1900  0.1uF  [CC0402_AEE]  147.9 245.26 180 top
C1901  0.1uF  [CC0402_AEE]  139.54 242.88 90 top
C1902  0.1uF  [CC0402_AEE]  145.17 243.16 90 top
C1903  0.1uF  [CC0402_AEE]  139.33 239.6 270 top
C1904  0.1uF  [CC0402_AEE]  141.49 242.9 90 top
C1905  0.1uF  [CC0402_AEE]  24.99 205.18 90 top
C1910  0.1uF  [CC0402_AEE]  75.36 285.14 270 bottom
C1911  0.1uF  [CC0402_AEE]  101.55 263.63 270 bottom
C1912  0.1uF  [CC0402_AEE]  139.06 145.57 0 top
C1913  47uF  [CC1210]  50.32 85.83 180 bottom
C1914  47uF  [CC1210]  37.29 71.58 270 top
C1916  0.1uF  [CC0402_AEE]  33.71 254.76 180 bottom
C1917  0.1uF  [CC0402_AEE]  37.31 254.74 180 bottom
C1918  0.1uF  [CC0402_AEE]  18.57 220.37 0 top
C1919  0.1uF  [CC0402_AEE]  18.47 218.47 270 bottom
C1920  0.1uF  [CC0402_AEE]  120.52 253.9 90 bottom
C1921  0.1uF  [CC0402_AEE]  121.92 253.9 90 bottom
C1924  0.1uF  [CC0402_AEE]  22.56 212.98 270 bottom
C1925  0.1uF  [CC0402_AEE]  18.87 213.74 180 top
C1926  0.1uF  [CC0402_AEE]  120.78 251.36 90 bottom
C1927  0.1uF  [CC0402_AEE]  122.17 251.36 90 bottom
C1933  10uF  [CC1210]  154.18 146.33 0 bottom
C1934  10uF  [CC1210]  154.18 147.98 0 top
C1935  0.47UF  [EMIFIL_101X43W474MV4E]  37.67 39.91 180 bottom
C1936  0.47UF  [EMIFIL_101X43W474MV4E]  37.67 47.91 180 bottom
C1937  0.47UF  [EMIFIL_101X43W474MV4E]  66.09 20.42 0 bottom
C1938  0.47UF  [EMIFIL_101X43W474MV4E]  66.19 31.6 0 bottom
C1943  0.1uF  [CC0402_AEE]  135.25 194.85 90 bottom
C1944  0.1uF  [CC0402_AEE]  129.41 193.58 90 bottom
C1946  470PF  [SMC0402A]  127 192.63 0 bottom
C1947  0.1uF  [CC0402_AEE]  160.32 219.2 180 bottom
C1949  0.1uF  [CC0402_AEE]  18.03 192.81 0 bottom
C1950  0.1uF  [CC0402_AEE]  167 245.9 270 top
C1951  0.1uF  [CC0402_AEE]  168.4 245.9 270 top
C1953  0.1uF  [CC0402_AEE]  11.3 154.54 90 bottom
C1954  0.1uF  [CC0402_AEE]  12.95 153.39 0 bottom
C1956  0.1uF  [CC0402_AEE]  113.92 231.8 270 bottom
C1957  0.1uF  [CC0402_AEE]  111.89 233.2 180 bottom
C1959  0.1uF  [CC0402_AEE]  5.33 196.12 180 bottom
C1960  0.1uF  [CC0402_AEE]  53.29 82.96 0 bottom
C1961  10UF  [CC1206]  56.64 81.08 270 bottom
C1962  10NF  [CC0402_AEE]  53.29 81.56 180 bottom
C1970  0.1uF  [CC0402_AEE]  111.63 224.44 180 bottom
C1971  0.1uF  [CC0402_AEE]  113.28 222.53 90 bottom
C1972  0.1uF  [CC0402_AEE]  111.76 219.99 180 bottom
C1973  0.1uF  [CC0402_AEE]  114.17 217.07 270 bottom
C1974  0.1uF  [CC0402_AEE]  112.78 217.07 270 bottom
C1981  0.1uF  [CC0402_AEE]  83.56 202.82 0 top
C1982  0.1uF  [CC0402_AEE]  83.56 201.4 0 top
C1990  0.1uF  [CC0402_AEE]  9.78 204.12 270 top
C1991  0.1uF  [CC0402_AEE]  111 248.69 270 bottom
C1992  0.1uF  [CC0402_AEE]  112.27 243.74 180 bottom
C1993  0.1uF  [CC0402_AEE]  111.18 239.96 90 bottom
C1994  0.1uF  [CC0402_AEE]  108.86 241.99 0 bottom
C1995  0.1uF  [CC0402_AEE]  108.84 244.25 0 bottom
C1996  0.1uF  [CC0402_AEE]  108.71 247.04 0 bottom
C1997  0.1uF  [CC0402_AEE]  108.97 248.57 0 bottom
C1998  0.1uF  [CC0402_AEE]  112.27 245.14 180 bottom
C1999  0.1uF  [SMC0402A]  52.91 207.27 180 top
C2000  0.1uF  [SMC0402A]  51.89 207.27 180 top
C2003  0.1uF  [CC0402_AEE]  72.52 233.58 180 bottom
C2004  0.1uF  [CC0402_AEE]  72.52 230.91 90 bottom
C2005  47uF  [CAPAE1300X1400N]  11.94 96.04 180 top
C2006  47uF  [CAPAE1300X1400N]  11.96 109.87 180 top
C2008  0.1uF  [CC0402_AEE]  18.29 190.91 0 top
C2009  0.1uF  [CC0402_AEE]  147.64 129.18 270 bottom
C2010  0.1uF  [CC0402_AEE]  110.9 252.57 180 bottom
C2011  0.1uF  [CC0402_AEE]  151 43.72 180 bottom
C2017  0.1uF  [CC0402_AEE]  119.1 106.5 90 bottom
C2018  0.1uF  [CC0402_AEE]  36.56 242.08 0 top
C2021  0.1uF  [CC0402_AEE]  109.07 25.43 0 bottom
C2023  0.1uF  [CC0402_AEE]  107.51 35.31 270 top
C2025  0.1uF  [CC0402_AEE]  92.86 267.41 270 bottom
C2026  0.082uF  [CC0402_AEE]  81.69 264.54 180 bottom
C2027  0.1uF  [CC0402_AEE]  78.56 262.54 0 top
C2028  0.082uF  [CC0402_AEE]  106.87 35.31 90 bottom
C2030  1NF  [CC0402_AEE]  67.34 279.48 90 top
C2032  1NF  [CC0402_AEE]  114.05 269.14 90 top
C2033  0.1uF  [CC0402_AEE]  15.88 276.51 0 top
C2034  0.1uF  [CC0402_AEE]  14.42 267.11 0 top
C2036  0.1uF  [CC0402_AEE]  14.48 271.86 0 top
C2037  0.1uF  [CC0402_AEE]  102.21 186.73 0 bottom
C2038  0.1uF  [CC0402_AEE]  98.58 190.8 90 bottom
C2039  680pF  [CC0402_AEE]  100 190.81 90 bottom
C2040  1uF  [CC0603]  47.64 245.1 0 bottom
C2043  0.1uF  [CC0402_AEE]  112.2 270.66 0 top
C2044  0.1uF  [CC0402_AEE]  76 277.46 270 top
C2045  0.1uF  [CC0402_AEE]  131.52 197.23 270 bottom
C2046  0.1uF  [CC0402_AEE]  127.86 197.28 270 bottom
C2051  150uF  [CAPAE830X1050N]  168.53 265.89 90 top
C2079  0.1uF  [CC0402_AEE]  123.44 245.52 90 top
C2080  0.1uF  [CC0402_AEE]  5.21 227.51 180 top
C2081  0.1uF  [CC0402_AEE]  6.25 233.3 90 top
C2082  0.1uF  [CC0402_AEE]  10.16 237.09 90 top
C2083  0.1uF  [CC0402_AEE]  14.73 237.09 90 top
C2084  0.1uF  [CC0402_AEE]  145.03 218.98 0 bottom
C2085  0.1uF  [CC0402_AEE]  8.2 235.79 90 bottom
C2086  0.1uF  [CC0402_AEE]  3.63 235.79 90 bottom
C2087  0.1uF  [CC0402_AEE]  10.16 234.34 90 top
C2088  0.1uF  [CC0402_AEE]  14.73 234.34 90 top
C2092  0.1uF  [CC0402_AEE]  63.63 249.07 270 bottom
C2093  0.1uF  [CC0402_AEE]  149.99 199.29 90 top
C2094  0.1uF  [CC0402_AEE]  154.94 199.29 90 top
C2095  0.1uF  [CC0402_AEE]  149.99 196.37 90 top
C2096  0.1uF  [CC0402_AEE]  154.94 196.37 90 top
C2097  0.1uF  [CC0402_AEE]  24.89 255.15 90 bottom
C2098  0.1uF  [CC0402_AEE]  150.37 193.58 90 top
C2099  0.1uF  [CC0402_AEE]  154.94 193.58 90 top
C2100  0.1uF  [CC0402_AEE]  7.82 227.69 180 top
C2101  0.1uF  [CC0402_AEE]  7.82 232.51 180 top
C2108  0.1uF  [CC0402_AEE]  165.96 212.57 90 top
C2109  0.1uF  [CC0402_AEE]  170.69 213.49 90 top
C2111  10NF  [CC0402_AEE]  34.87 81.69 90 bottom
C2112  10NF  [CC0402_AEE]  32.84 74.7 0 top
C2117  10NF  [CC0402_AEE]  49.4 65.2 0 bottom
C2118  10NF  [CC0402_AEE]  45.09 73.84 180 bottom
C2122  10uF  [CC1210]  162.51 281.76 180 top
C2123  0.47UF  [EMIFIL_101X43W474MV4E]  170.64 60.23 90 top
C2125  10uF  [CC1210]  105.69 90.88 180 top
C2126  10uF  [CC1210]  105.69 94.31 180 top
C2127  150uF  [CAPAE830X1050N]  117.2 106.56 90 top
C2128  150uF  [CAPAE830X1050N]  154.69 282.25 180 bottom
C2129  150uF  [CAPAE830X1050N]  20.15 267.27 0 top
C2131  10uF  [CC1210]  14.22 264.7 270 bottom
C2132  10uF  [CC1210]  10.29 264.7 270 bottom
C2133  0.1uF  [CC0402_AEE]  117.63 227.18 0 top
C2134  0.1uF  [CC0402_AEE]  161.11 249.61 270 top
C2135  0.1uF  [CC0402_AEE]  10.08 159.34 270 bottom
C2136  0.1uF  [CC0402_AEE]  146.96 236.4 0 top
C2137  0.1uF  [CC0402_AEE]  147.22 234.04 90 top
C2138  0.1uF  [CC0402_AEE]  15.42 180.95 90 top
C2139  1000PF  [CC1206]  168.99 35.61 90 top
C2140  1000PF  [CC1206]  5.08 53.85 90 bottom
C2141  15uF  [CC1210]  83.92 217.07 0 bottom
C2142  15uF  [CC1210]  83.39 213.62 0 bottom
C2143  15uF  [CC1210]  83.24 223.57 90 bottom
C2144  15uF  [CC1210]  97.28 250.6 0 bottom
C2145  15uF  [CC1210]  97.28 254.15 0 bottom
C2146  15uF  [CC1210]  93.22 245.26 180 bottom
C2147  0.1uF  [CC0402_AEE]  155.8 173.46 90 top
C2148  0.1uF  [CC0402_AEE]  164.29 176.91 0 top
C2149  0.1uF  [CC0402_AEE]  166.17 175.47 90 top
C2150  0.1uF  [CC0402_AEE]  145.47 171.81 90 bottom
C2151  0.1uF  [CC0402_AEE]  146.69 168.33 0 bottom
C2152  0.1uF  [CC0402_AEE]  165.84 189.28 0 bottom
C2153  0.1uF  [CC0402_AEE]  162.08 196.6 0 bottom
C2154  0.1uF  [CC0402_AEE]  154.53 244.1 90 top
C2155  0.1uF  [CC0402_AEE]  123.83 156.92 90 top
C2156  0.1uF  [CC0402_AEE]  127.86 151.67 270 top
C2157  0.1uF  [CC0402_AEE]  131.42 156.69 270 top
C2158  10NF  [CC0402_AEE]  145.35 245.51 0 top
C2159  1000PF  [CC1206]  122.63 280.52 0 bottom
C2160  0.1uF  [CC0402_AEE]  141.59 182.47 270 top
C2161  0.1uF  [CC0402_AEE]  138.93 177.59 270 top
C2162  0.1uF  [CC0402_AEE]  133.56 183.06 90 top
C2163  0.1uF  [CC0402_AEE]  172.66 241.8 90 bottom
C2164  0.1uF  [CC0402_AEE]  170.95 234.33 270 bottom
C20114  0.1uF  [CC0402_AEE]  169.23 231.92 0 top
C20115  0.1uF  [CC0402_AEE]  137.06 253.97 90 top
C20116  0.1uF  [CC0402_AEE]  135.64 253.79 90 top
CR1L1  BAT54C  [SOT23]  17.91 235.66 0 top
D2  LED/GREEN  [LED_SML-LX23GC-TR]  54.05 92.74 180 top
D4  S1B  [DIOM5127X229N]  68.55 86.9 270 top
D8  S1B  [DIOM5127X229N]  74.14 88.34 90 top
D10  CMR1U-02M  [DIOM5226X262N_A]  39.7 109.43 180 top
D15  LED  [LED_LTST-C190]  24.87 184.36 270 top
D31  5.0SMDJ26CA  [DIOM7959X262N_LF_BI]  125.46 28.68 0 bottom
D32  MMSZ5245B-7-F  [SOD3715X145N_DI_AEE]  123.77 131.47 270 top
D38  TL431  [SOT95P230X110-3N]  108.13 145.72 180 bottom
D52  MMSZ5245B-7-F  [SOD3715X145N_DI_AEE]  17.78 122.2 180 bottom
D133  PMEG3002AEB  [SODFL1608X65N_AEE]  151.76 206.91 0 top
D143  STPS160A  [DIO_DO214AC_SMA]  134.57 271.68 270 bottom
D144  STPS160A  [DIO_DO214AC_SMA]  145.54 283.11 90 bottom
D145  100V  [SODFL2513X80N]  150.37 274.32 90 bottom
D146  100V  [SODFL2513X80N]  147.65 277.27 0 top
D10015  1N4148W  [SOD2512X115N]  130.51 133.94 0 top
D10025  BAT46WJ,115  [SODFL2513X80N]  159.51 54.38 90 top
D10026  BAT46WJ,115  [SODFL2513X80N]  159.38 61.88 270 top
D10027  ESD217-B1-02EL E6327  [DIO100X60X32-2N]  172.59 62.77 0 bottom
D10028  ESD217-B1-02EL E6327  [DIO100X60X32-2N]  172.59 60.1 180 bottom
D10034  BAV3004W  [SOD3715X145N_DI]  166.62 92.1 0 bottom
D10035  BAV3004W  [SOD3715X145N_DI]  166.62 92.1 0 top
D10036  BAV3004W  [SOD3715X145N_DI]  154.43 75.97 270 top
D10037  BAV3004W  [SOD3715X145N_DI]  154.43 75.97 270 bottom
D10038  1N4148W  [SOD2512X115N]  161.85 97.41 0 top
D10039  TL431  [SOT95P230X110-3N]  103.76 128.42 180 bottom
D10048  V12P10-M3/86A  [DIO_TO-277A]  81.38 131.22 180 top
D10049  -  [1SMB5932BT3G]  93.47 128.2 90 bottom
D10054  SMBJ10CA  [DIO_DO214AA_SMB_BI]  118.08 27.4 90 top
D10057  SMBJ10CA  [DIO_DO214AA_SMB_BI]  120.31 280.93 180 top
D10060  SMBJ10CA  [DIO_DO214AA_SMB_BI]  122.42 27.38 270 top
D10061  SMBJ10CA  [DIO_DO214AA_SMB_BI]  103.12 17.05 270 top
D10062  5.0SMDJ26CA  [DIOM7959X262N_LF_BI]  132.17 46.01 0 top
D10063  5.0SMDJ26CA  [DIOM7959X262N_LF_BI]  132.12 46.01 0 bottom
D10064  SMBJ10CA  [DIO_DO214AA_SMB_BI]  120.33 285.24 0 top
D10065  SMBJ10CA  [DIO_DO214AA_SMB_BI]  114.01 273.84 0 bottom
D10066  SMBJ10CA  [DIO_DO214AA_SMB_BI]  123.81 285 180 bottom
D10067  SMBJ10CA  [DIO_DO214AA_SMB_BI]  107.44 17.05 270 top
D10068  ES1D  [DIOM5027X244N_A]  33.66 123.73 270 top
D10071  5.0SMDJ58CA  [DIOM7959X262N_LF_BI]  76.58 33.61 0 bottom
D10072  5.0SMDJ58CA  [DIOM7959X262N_LF_BI]  90.09 33.38 180 bottom
D10073  5.0SMDJ58CA  [DIOM7959X262N_LF_BI]  42.24 32.23 180 bottom
D10074  5.0SMDJ58CA  [DIOM7959X262N_LF_BI]  42.27 32.26 0 top
